# Altium PCB Inverter45attempt.PcbDoc (part 3 of 3)
Units mm, origin at the board's own origin, x right, y up, seen from the top; angles counter-clockwise.
Board outline 150 x 150 mm, 2 copper layers (Top Layer, Bottom Layer), stack 1.74 mm thick; 275 components, 191 nets, 1690 pads, 661 vias.
Unrouted connection lines stored in the file: 411.
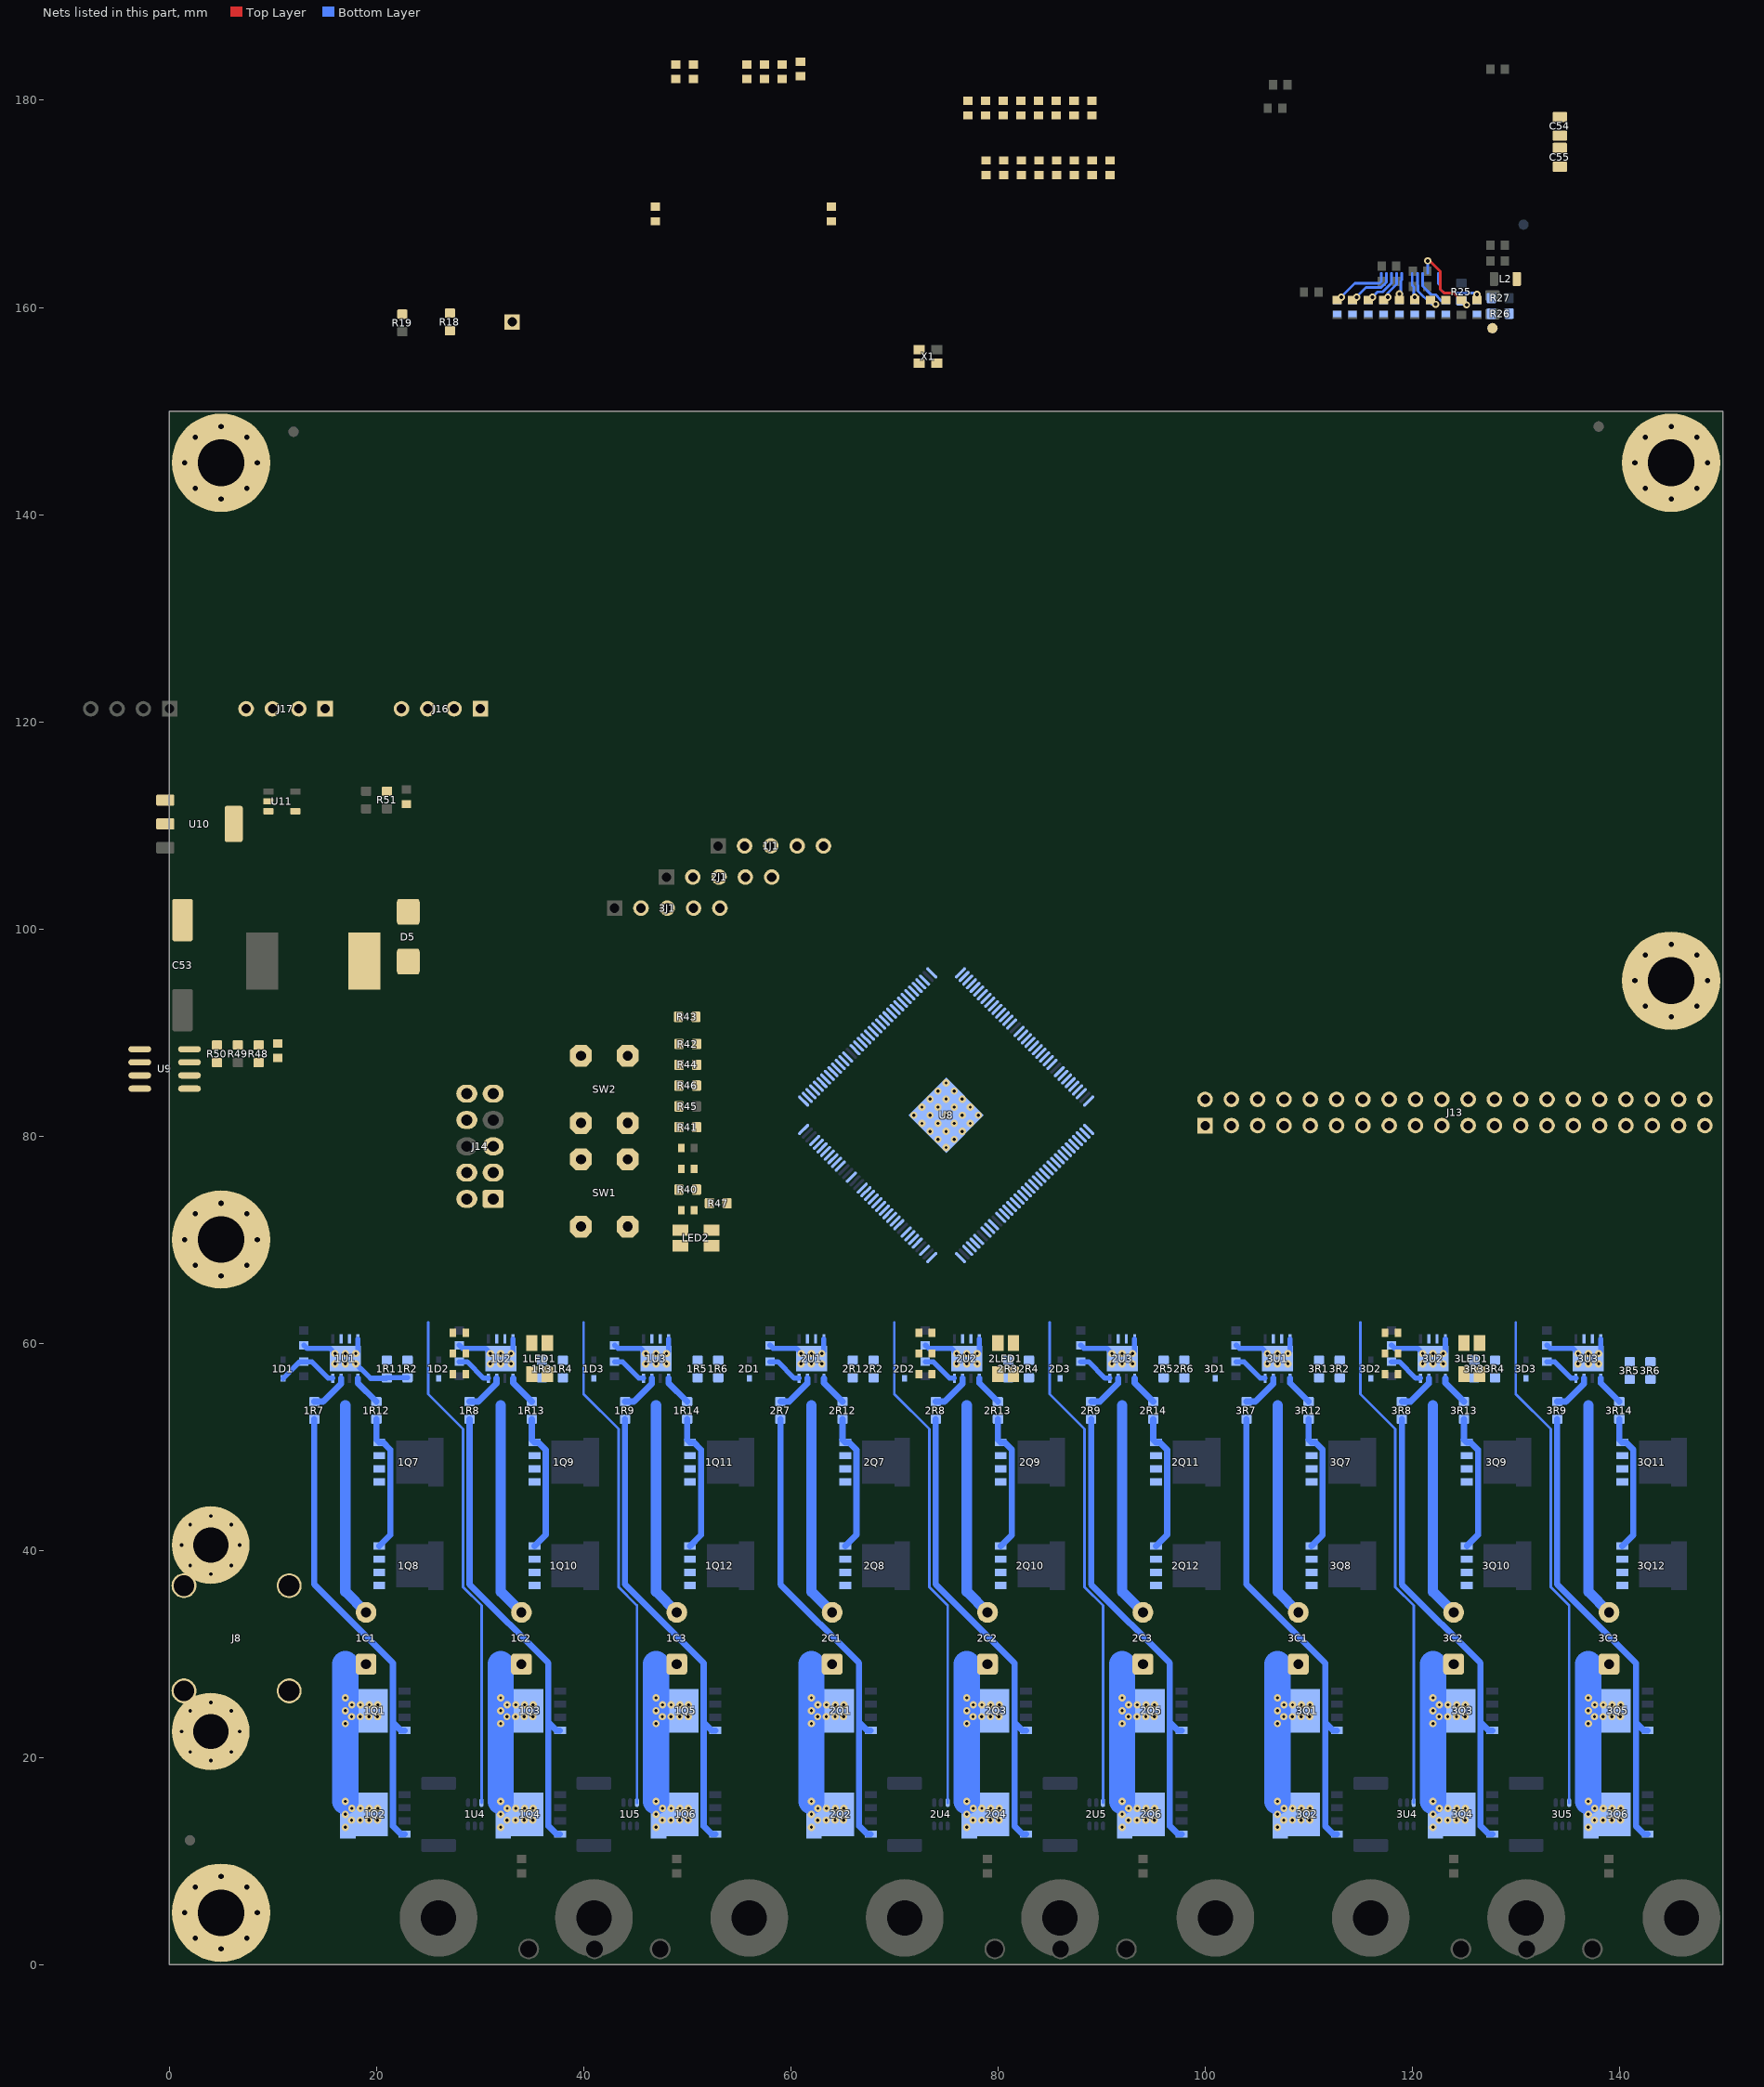
[diagram p3: the nets of this part, all layers, seen from the top]

## Via types
v1: diameter 0.7, hole 0.3, Top Layer to Bottom Layer, 475 vias
v2: diameter 0.7, hole 0.35, Top Layer to Bottom Layer, 119 vias
v3: diameter 1.27, hole 0.5, Top Layer to Bottom Layer, 40 vias
v4: diameter 1, hole 0.6, Top Layer to Bottom Layer, 27 vias

## Nets (pads, with @x,y where several pads share a name; then routed paths per layer and width w, separated by ;. In a path a pad name is that pad's centre, name@x,y a point inside that pad or via, vN(x,y) a via of type N, cw(c..) or ccw(c..) an arc to the next point about the centre after c; other vN are vias at no path point) (continued)
DCBUS: 1C1.1 1C2.1 1C3.1 1Q1.D 1Q2.D 1Q3.D 1Q4.D 1Q5.D 1Q6.D 2C1.1 2C2.1 2C3.1 2Q1.D 2Q2.D 2Q3.D 2Q4.D 2Q5.D 2Q6.D 3C1.1 3C2.1 3C3.1 3Q1.D 3Q2.D 3Q3.D 3Q4.D 3Q5.D 3Q6.D J6.1 J8.1 R26.2 R48.2 U9.6 U11.4 | length 792
  Bottom Layer w2.54: v1(17,15.75) v1(17,23.25) ; v1(32,15.75) v1(32,23.25) ; v1(47,15.75) v1(47,23.25) ; v1(62,15.75) v1(62,23.25) ; v1(77,15.75) v1(77,23.25) ; v1(92,15.75) v1(92,23.25) ; v1(107,15.75) v1(107,23.25) ; v1(122,15.75) v1(122,23.25) ; v1(137,15.75) v1(137,23.25) ; v1(17,23.25) v1(17,24.5) ; v1(17,23.25) v1(17,24.5) ; v1(17,23.25) v1(17,24.5) ; v1(17,23.25) v1(17,24.5) ; v1(17,23.25) v1(17,24.5) ; v1(17,23.25) v1(17,24.5) ; v1(17,23.25) v1(17,24.5) ; v1(17,23.25) v1(17,24.5) ; v1(17,23.25) v1(17,24.5) ; v1(17,23.25) v1(17,24.5) ; v1(17,23.25) v1(17,24.5) ; v1(17,23.25) v1(17,24.5) ; v1(17,23.25) v1(17,24.5) ; v1(17,23.25) v1(17,24.5) ; v1(17,24.5) v1(17,25.75) ; v1(17,24.5) v1(17,25.75) ; v1(17,24.5) v1(17,25.75) ; v1(17,24.5) v1(17,25.75) ; v1(17,24.5) v1(17,25.75) ; v1(17,24.5) v1(17,25.75) ; v1(17,24.5) v1(17,25.75) ; v1(17,24.5) v1(17,25.75) ; v1(17,24.5) v1(17,25.75) ; v1(17,24.5) v1(17,25.75) ; v1(17,24.5) v1(17,25.75) ; v1(17,24.5) v1(17,25.75) ; v1(17,24.5) v1(17,25.75) ; v1(17,24.5) v1(17,25.75) ; v1(17,25.75) 17,29 ; v1(17,25.75) 17,29 ; v1(17,25.75) 17,29 ; v1(17,25.75) 17,29 ; v1(17,25.75) 17,29 ; v1(17,25.75) 17,29 ; v1(17,25.75) 17,29 ; v1(17,25.75) 17,29 ; v1(17,25.75) 17,29 ; v1(17,25.75) 17,29 ; v1(17,25.75) 17,29 ; v1(17,25.75) 17,29 ; v1(17,25.75) 17,29 ; v1(17,25.75) 17,29 ; v1(32,23.25) v1(32,24.5) ; v1(32,23.25) v1(32,24.5) ; v1(32,23.25) v1(32,24.5) ; v1(32,23.25) v1(32,24.5) ; v1(32,23.25) v1(32,24.5) ; v1(32,23.25) v1(32,24.5) ; v1(32,23.25) v1(32,24.5) ; v1(32,23.25) v1(32,24.5) ; v1(32,23.25) v1(32,24.5) ; v1(32,23.25) v1(32,24.5) ; v1(32,23.25) v1(32,24.5) ; v1(32,23.25) v1(32,24.5) ; v1(32,23.25) v1(32,24.5) ; v1(32,23.25) v1(32,24.5) ; v1(32,24.5) v1(32,25.75) ; v1(32,24.5) v1(32,25.75) ; v1(32,24.5) v1(32,25.75) ; v1(32,24.5) v1(32,25.75) ; v1(32,24.5) v1(32,25.75) ; v1(32,24.5) v1(32,25.75) ; v1(32,24.5) v1(32,25.75) ; v1(32,24.5) v1(32,25.75) ; v1(32,24.5) v1(32,25.75) ; v1(32,24.5) v1(32,25.75) ; v1(32,24.5) v1(32,25.75) ; v1(32,24.5) v1(32,25.75) ; v1(32,24.5) v1(32,25.75) ; v1(32,24.5) v1(32,25.75) ; v1(32,25.75) 32,29 ; v1(32,25.75) 32,29 ; v1(32,25.75) 32,29 ; v1(32,25.75) 32,29 ; v1(32,25.75) 32,29 ; v1(32,25.75) 32,29 ; v1(32,25.75) 32,29 ; v1(32,25.75) 32,29 ; v1(32,25.75) 32,29 ; v1(32,25.75) 32,29 ; v1(32,25.75) 32,29 ; v1(32,25.75) 32,29 ; v1(32,25.75) 32,29 ; v1(32,25.75) 32,29 ; v1(47,23.25) v1(47,24.5) ; v1(47,23.25) v1(47,24.5) ; v1(47,23.25) v1(47,24.5) ; v1(47,23.25) v1(47,24.5) ; v1(47,23.25) v1(47,24.5) ; v1(47,23.25) v1(47,24.5) ; v1(47,23.25) v1(47,24.5) ; v1(47,23.25) v1(47,24.5) ; v1(47,23.25) v1(47,24.5) ; v1(47,23.25) v1(47,24.5) ; v1(47,23.25) v1(47,24.5) ; v1(47,23.25) v1(47,24.5) ; v1(47,23.25) v1(47,24.5) ; v1(47,23.25) v1(47,24.5) ; v1(47,24.5) v1(47,25.75) ; v1(47,24.5) v1(47,25.75) ; v1(47,24.5) v1(47,25.75) ; v1(47,24.5) v1(47,25.75) ; v1(47,24.5) v1(47,25.75) ; v1(47,24.5) v1(47,25.75) ; v1(47,24.5) v1(47,25.75) ; v1(47,24.5) v1(47,25.75) ; v1(47,24.5) v1(47,25.75) ; v1(47,24.5) v1(47,25.75) ; v1(47,24.5) v1(47,25.75) ; v1(47,24.5) v1(47,25.75) ; v1(47,24.5) v1(47,25.75) ; v1(47,24.5) v1(47,25.75) ; v1(47,25.75) 47,29 ; v1(47,25.75) 47,29 ; v1(47,25.75) 47,29 ; v1(47,25.75) 47,29 ; v1(47,25.75) 47,29 ; v1(47,25.75) 47,29 ; v1(47,25.75) 47,29 ; v1(47,25.75) 47,29 ; v1(47,25.75) 47,29 ; v1(47,25.75) 47,29 ; v1(47,25.75) 47,29 ; v1(47,25.75) 47,29 ; v1(47,25.75) 47,29 ; v1(47,25.75) 47,29 ; v1(62,23.25) v1(62,24.5) ; v1(62,23.25) v1(62,24.5) ; v1(62,23.25) v1(62,24.5) ; v1(62,23.25) v1(62,24.5) ; v1(62,23.25) v1(62,24.5) ; v1(62,23.25) v1(62,24.5) ; v1(62,23.25) v1(62,24.5) ; v1(62,23.25) v1(62,24.5) ; v1(62,23.25) v1(62,24.5) ; v1(62,23.25) v1(62,24.5) ; v1(62,23.25) v1(62,24.5) ; v1(62,23.25) v1(62,24.5) ; v1(62,23.25) v1(62,24.5) ; v1(62,23.25) v1(62,24.5) ; v1(62,24.5) v1(62,25.75) ; v1(62,24.5) v1(62,25.75) ; v1(62,24.5) v1(62,25.75) ; v1(62,24.5) v1(62,25.75) ; v1(62,24.5) v1(62,25.75) ; v1(62,24.5) v1(62,25.75) ; v1(62,24.5) v1(62,25.75) ; v1(62,24.5) v1(62,25.75) ; v1(62,24.5) v1(62,25.75) ; v1(62,24.5) v1(62,25.75) ; v1(62,24.5) v1(62,25.75) ; v1(62,24.5) v1(62,25.75) ; v1(62,24.5) v1(62,25.75) ; v1(62,24.5) v1(62,25.75) ; v1(62,25.75) 62,29 ; v1(62,25.75) 62,29 ; v1(62,25.75) 62,29 ; v1(62,25.75) 62,29 ; v1(62,25.75) 62,29 ; v1(62,25.75) 62,29 ; v1(62,25.75) 62,29 ; v1(62,25.75) 62,29 ; v1(62,25.75) 62,29 ; v1(62,25.75) 62,29 ; v1(62,25.75) 62,29 ; v1(62,25.75) 62,29 ; v1(62,25.75) 62,29 ; v1(62,25.75) 62,29 ; v1(77,23.25) v1(77,24.5) ; v1(77,23.25) v1(77,24.5) ; v1(77,23.25) v1(77,24.5) ; v1(77,23.25) v1(77,24.5) ; v1(77,23.25) v1(77,24.5) ; v1(77,23.25) v1(77,24.5) ; v1(77,23.25) v1(77,24.5) ; v1(77,23.25) v1(77,24.5) ; v1(77,23.25) v1(77,24.5) ; v1(77,23.25) v1(77,24.5) ; v1(77,23.25) v1(77,24.5) ; v1(77,23.25) v1(77,24.5) ; v1(77,23.25) v1(77,24.5) ; v1(77,23.25) v1(77,24.5) ; v1(77,24.5) v1(77,25.75) ; v1(77,24.5) v1(77,25.75) ; v1(77,24.5) v1(77,25.75) ; v1(77,24.5) v1(77,25.75) ; v1(77,24.5) v1(77,25.75) ; v1(77,24.5) v1(77,25.75) ; v1(77,24.5) v1(77,25.75) ; v1(77,24.5) v1(77,25.75) ; v1(77,24.5) v1(77,25.75) ; v1(77,24.5) v1(77,25.75) ; v1(77,24.5) v1(77,25.75) ; v1(77,24.5) v1(77,25.75) ; v1(77,24.5) v1(77,25.75) ; v1(77,24.5) v1(77,25.75) ; v1(77,25.75) 77,29 ; v1(77,25.75) 77,29 ; v1(77,25.75) 77,29 ; v1(77,25.75) 77,29 ; v1(77,25.75) 77,29 ; v1(77,25.75) 77,29 ; v1(77,25.75) 77,29 ; v1(77,25.75) 77,29 ; v1(77,25.75) 77,29 ; v1(77,25.75) 77,29 ; v1(77,25.75) 77,29 ; v1(77,25.75) 77,29 ; v1(77,25.75) 77,29 ; v1(77,25.75) 77,29 ; v1(92,23.25) v1(92,24.5) ; v1(92,23.25) v1(92,24.5) ; v1(92,23.25) v1(92,24.5) ; v1(92,23.25) v1(92,24.5) ; v1(92,23.25) v1(92,24.5) ; v1(92,23.25) v1(92,24.5) ; v1(92,23.25) v1(92,24.5) ; v1(92,23.25) v1(92,24.5) ; v1(92,23.25) v1(92,24.5) ; v1(92,23.25) v1(92,24.5) ; v1(92,23.25) v1(92,24.5) ; v1(92,23.25) v1(92,24.5) ; v1(92,23.25) v1(92,24.5) ; v1(92,23.25) v1(92,24.5) ; v1(92,24.5) v1(92,25.75) ; v1(92,24.5) v1(92,25.75) ; v1(92,24.5) v1(92,25.75) ; v1(92,24.5) v1(92,25.75) ; v1(92,24.5) v1(92,25.75) ; v1(92,24.5) v1(92,25.75) ; v1(92,24.5) v1(92,25.75) ; v1(92,24.5) v1(92,25.75) ; v1(92,24.5) v1(92,25.75) ; v1(92,24.5) v1(92,25.75) ; v1(92,24.5) v1(92,25.75) ; v1(92,24.5) v1(92,25.75) ; v1(92,24.5) v1(92,25.75) ; v1(92,24.5) v1(92,25.75) ; v1(92,25.75) 92,29 ; v1(92,25.75) 92,29 ; v1(92,25.75) 92,29 ; v1(92,25.75) 92,29 ; v1(92,25.75) 92,29 ; v1(92,25.75) 92,29 ; v1(92,25.75) 92,29 ; v1(92,25.75) 92,29 ; v1(92,25.75) 92,29 ; v1(92,25.75) 92,29 ; v1(92,25.75) 92,29 ; v1(92,25.75) 92,29 ; v1(92,25.75) 92,29 ; v1(92,25.75) 92,29 ; v1(107,23.25) v1(107,24.5) ; v1(107,23.25) v1(107,24.5) ; v1(107,23.25) v1(107,24.5) ; v1(107,23.25) v1(107,24.5) ; v1(107,23.25) v1(107,24.5) ; v1(107,23.25) v1(107,24.5) ; v1(107,23.25) v1(107,24.5) ; v1(107,23.25) v1(107,24.5) ; v1(107,23.25) v1(107,24.5) ; v1(107,23.25) v1(107,24.5) ; v1(107,23.25) v1(107,24.5) ; v1(107,23.25) v1(107,24.5) ; v1(107,23.25) v1(107,24.5) ; v1(107,23.25) v1(107,24.5) ; v1(107,24.5) v1(107,25.75) ; v1(107,24.5) v1(107,25.75) ; v1(107,24.5) v1(107,25.75) ; v1(107,24.5) v1(107,25.75) ; v1(107,24.5) v1(107,25.75) ; v1(107,24.5) v1(107,25.75) ; v1(107,24.5) v1(107,25.75) ; v1(107,24.5) v1(107,25.75) ; v1(107,24.5) v1(107,25.75) ; v1(107,24.5) v1(107,25.75) ; v1(107,24.5) v1(107,25.75) ; v1(107,24.5) v1(107,25.75) ; v1(107,24.5) v1(107,25.75) ; v1(107,24.5) v1(107,25.75) ; v1(107,25.75) 107,29 ; v1(107,25.75) 107,29 ; v1(107,25.75) 107,29 ; v1(107,25.75) 107,29 ; v1(107,25.75) 107,29 ; v1(107,25.75) 107,29 ; v1(107,25.75) 107,29 ; v1(107,25.75) 107,29 ; v1(107,25.75) 107,29 ; v1(107,25.75) 107,29 ; v1(107,25.75) 107,29 ; v1(107,25.75) 107,29 ; v1(107,25.75) 107,29 ; v1(107,25.75) 107,29 ; v1(122,23.25) v1(122,24.5) ; v1(122,23.25) v1(122,24.5) ; v1(122,23.25) v1(122,24.5) ; v1(122,23.25) v1(122,24.5) ; v1(122,23.25) v1(122,24.5) ; v1(122,23.25) v1(122,24.5) ; v1(122,23.25) v1(122,24.5) ; v1(122,23.25) v1(122,24.5) ; v1(122,23.25) v1(122,24.5) ; v1(122,23.25) v1(122,24.5) ; v1(122,23.25) v1(122,24.5) ; v1(122,23.25) v1(122,24.5) ; v1(122,23.25) v1(122,24.5) ; v1(122,23.25) v1(122,24.5) ; v1(122,24.5) v1(122,25.75) ; v1(122,24.5) v1(122,25.75) ; v1(122,24.5) v1(122,25.75) ; v1(122,24.5) v1(122,25.75) ; v1(122,24.5) v1(122,25.75) ; v1(122,24.5) v1(122,25.75) ; v1(122,24.5) v1(122,25.75) ; v1(122,24.5) v1(122,25.75) ; v1(122,24.5) v1(122,25.75) ; v1(122,24.5) v1(122,25.75) ; v1(122,24.5) v1(122,25.75) ; v1(122,24.5) v1(122,25.75) ; v1(122,24.5) v1(122,25.75) ; v1(122,24.5) v1(122,25.75) ; v1(122,25.75) 122,29 ; v1(122,25.75) 122,29 ; v1(122,25.75) 122,29 ; v1(122,25.75) 122,29 ; v1(122,25.75) 122,29 ; v1(122,25.75) 122,29 ; v1(122,25.75) 122,29 ; v1(122,25.75) 122,29 ; v1(122,25.75) 122,29 ; v1(122,25.75) 122,29 ; v1(122,25.75) 122,29 ; v1(122,25.75) 122,29 ; v1(122,25.75) 122,29 ; v1(122,25.75) 122,29 ; v1(137,23.25) v1(137,24.5) ; v1(137,23.25) v1(137,24.5) ; v1(137,23.25) v1(137,24.5) ; v1(137,23.25) v1(137,24.5) ; v1(137,23.25) v1(137,24.5) ; v1(137,23.25) v1(137,24.5) ; v1(137,23.25) v1(137,24.5) ; v1(137,23.25) v1(137,24.5) ; v1(137,23.25) v1(137,24.5) ; v1(137,23.25) v1(137,24.5) ; v1(137,23.25) v1(137,24.5) ; v1(137,23.25) v1(137,24.5) ; v1(137,23.25) v1(137,24.5) ; v1(137,23.25) v1(137,24.5) ; v1(137,24.5) v1(137,25.75) ; v1(137,24.5) v1(137,25.75) ; v1(137,24.5) v1(137,25.75) ; v1(137,24.5) v1(137,25.75) ; v1(137,24.5) v1(137,25.75) ; v1(137,24.5) v1(137,25.75) ; v1(137,24.5) v1(137,25.75) ; v1(137,24.5) v1(137,25.75) ; v1(137,24.5) v1(137,25.75) ; v1(137,24.5) v1(137,25.75) ; v1(137,24.5) v1(137,25.75) ; v1(137,24.5) v1(137,25.75) ; v1(137,24.5) v1(137,25.75) ; v1(137,24.5) v1(137,25.75) ; v1(137,25.75) 137,29 ; v1(137,25.75) 137,29 ; v1(137,25.75) 137,29 ; v1(137,25.75) 137,29 ; v1(137,25.75) 137,29 ; v1(137,25.75) 137,29 ; v1(137,25.75) 137,29 ; v1(137,25.75) 137,29 ; v1(137,25.75) 137,29 ; v1(137,25.75) 137,29 ; v1(137,25.75) 137,29 ; v1(137,25.75) 137,29 ; v1(137,25.75) 137,29 ; v1(137,25.75) 137,29
  other v1: 17,13.25 32,13.25 47,13.25 62,13.25 77,13.25 92,13.25 107,13.25 122,13.25 137,13.25 17.6,13.925 18.425,13.925 19.275,13.925 20.1,13.925 32.6,13.925 33.425,13.925 34.275,13.925 35.1,13.925 47.6,13.925 48.425,13.925 49.275,13.925 50.1,13.925 62.6,13.925 63.425,13.925 64.275,13.925 65.1,13.925 77.6,13.925 78.425,13.925 79.275,13.925 80.1,13.925 92.6,13.925 93.425,13.925 94.275,13.925 95.1,13.925 107.6,13.925 108.425,13.925 109.275,13.925 110.1,13.925 122.6,13.925 123.425,13.925 124.275,13.925 125.1,13.925 137.6,13.925 138.425,13.925 139.275,13.925 140.1,13.925 17,14.5 32,14.5 47,14.5 62,14.5 77,14.5 92,14.5 107,14.5 122,14.5 137,14.5 17.625,15.075 18.45,15.075 19.3,15.075 20.125,15.075 32.625,15.075 33.45,15.075 34.3,15.075 35.125,15.075 47.625,15.075 48.45,15.075 49.3,15.075 50.125,15.075 62.625,15.075 63.45,15.075 64.3,15.075 65.125,15.075 77.625,15.075 78.45,15.075 79.3,15.075 80.125,15.075 92.625,15.075 93.45,15.075 94.3,15.075 95.125,15.075 107.625,15.075 108.45,15.075 109.3,15.075 110.125,15.075 122.625,15.075 123.45,15.075 124.3,15.075 125.125,15.075 137.625,15.075 138.45,15.075 139.3,15.075 140.125,15.075 17.6,23.925 18.425,23.925 19.275,23.925 20.1,23.925 32.6,23.925 33.425,23.925 34.275,23.925 35.1,23.925 47.6,23.925 48.425,23.925 49.275,23.925 50.1,23.925 62.6,23.925 63.425,23.925 64.275,23.925 65.1,23.925 77.6,23.925 78.425,23.925 79.275,23.925 80.1,23.925 92.6,23.925 93.425,23.925 94.275,23.925 95.1,23.925 107.6,23.925 108.425,23.925 109.275,23.925 110.1,23.925 122.6,23.925 123.425,23.925 124.275,23.925 125.1,23.925 137.6,23.925 138.425,23.925 139.275,23.925 140.1,23.925 17.625,25.075 18.45,25.075 19.3,25.075 20.125,25.075 32.625,25.075 33.45,25.075 34.3,25.075 35.125,25.075 47.625,25.075 48.45,25.075 49.3,25.075 50.125,25.075 62.625,25.075 63.45,25.075 64.3,25.075 65.125,25.075 77.625,25.075 78.45,25.075 79.3,25.075 80.125,25.075 92.625,25.075 93.45,25.075 94.3,25.075 95.125,25.075 107.625,25.075 108.45,25.075 109.3,25.075 110.125,25.075 122.625,25.075 123.45,25.075 124.3,25.075 125.125,25.075 137.625,25.075 138.45,25.075 139.3,25.075 140.125,25.075
  other v2: 4,19.7 2.02,20.52 5.98,20.52 1.2,22.5 6.8,22.5 2.02,24.48 5.98,24.48 4,25.3
ENC_A1: 1J1.2 U8.60
ENC_A2: 2J1.2 U8.57
ENC_A3: 3J1.2 U8.48
ENC_B1: 1J1.3 U8.61
ENC_B2: 2J1.3 U8.58
ENC_B3: 3J1.3 U8.55
ENC_Z1: 1J1.4 U8.62
ENC_Z2: 2J1.4 U8.59
ENC_Z3: 3J1.4 U8.56
GND: 1C1.2 1C2.2 1C3.2 1C7.1 1C8.1 1C9.1 1J1.5 1Q7.S 1Q8.S 1Q9.S 1Q10.S 1Q11.S 1Q12.S 1R1.1 1R2.1 1R3.1 1R4.1 1R5.1 1R6.1 1U1.4 1U1.9 1U2.4 1U2.9 1U3.4 1U3.9 2C1.2 2C2.2 2C3.2 2C7.1 2C8.1 2C9.1 2J1.5 2Q7.S 2Q8.S 2Q9.S 2Q10.S 2Q11.S 2Q12.S 2R1.1 2R2.1 2R3.1 2R4.1 2R5.1 2R6.1 2U1.4 2U1.9 2U2.4 2U2.9 2U3.4 2U3.9 3C1.2 3C2.2 3C3.2 3C7.1 3C8.1 3C9.1 3J1.5 3Q7.S 3Q8.S 3Q9.S 3Q10.S 3Q11.S 3Q12.S 3R1.1 3R2.1 3R3.1 3R4.1 3R5.1 3R6.1 3U1.4 3U1.9 3U2.4 3U2.9 3U3.4 3U3.9 C28.1 C29.1 C30.1 C31.1 C32.1 C33.1 C34.1 C35.1 C36.1 C37.1 C38.1 C39.1 C40.1 C41.1 C42.1 C43.1 C44.1 C53.2 C54.1 C55.1 C56.1 C57.1 C58.1 C59.1 C60.1 C61.1 C62.1 C63.1 C65.1 D5.A J7.1 J8.2 J13.39 J13.40 J14.2 J14.10 J17.1 J17.2 J17.3 J17.4 MH1.1 MH2.1 MH3.1 MH4.1 MH5.1 R47.1 R50.1 SP1.1 SW1.1 SW2.1 U8.42 U8.53 U8.63 U8.68 U8.83 U8.95 U8.104 U8.116 U8.125 U8.133 U8.137 U8.142 U8.145 U9.4 U10.1 U11.2 X1.2 | length 234.6
  Bottom Layer w0.5: 1C7.1@13,59.8 13.3,59.5 15.5,59.5 v1(16,59) ; 1U1.9@18,58 18.495,57.505 18.536,57.505 19.441,56.6 20.95,56.6 1R1.1@21,56.65 1R2.1@23,56.65 ; v1(18,59) 18.2,59.2 1U1.4@18.2,60.395 ; 1C8.1@28,59.8 28.3,59.5 30.5,59.5 v1(31,59) ; 1U2.9@33.2,59.2 1U2.4@33.2,60.395 ; 1C9.1@43,59.8 43.3,59.5 45.5,59.5 v1(46,59) ; 1U3.9@48.2,59.2 1U3.4@48.2,60.395 ; 2C7.1@58,59.8 58.3,59.5 60.5,59.5 v1(61,59) ; v1(63,59) 63.2,59.2 2U1.4@63.2,60.395 ; 2C8.1@73,59.8 73.3,59.5 75.5,59.5 v1(76,59) ; 2U2.9@78.2,59.2 2U2.4@78.2,60.395 ; 2C9.1@88,59.8 88.3,59.5 90.5,59.5 v1(91,59) ; 2U3.9@93.2,59.2 2U3.4@93.2,60.395 ; 3C7.1@103,59.8 103.3,59.5 105.5,59.5 v1(106,59) ; v1(108,59) 108.2,59.2 3U1.4@108.2,60.395 ; 3C8.1@118,59.8 118.3,59.5 120.5,59.5 v1(121,59) ; 3U2.9@123.2,59.2 3U2.4@123.2,60.395 ; 3C9.1@133,59.8 133.3,59.5 135.5,59.5 v1(136,59) ; 3U3.9@138.2,59.2 3U3.4@138.2,60.395
  Bottom Layer w1: 17,54 17,36 1C1.2@19,34 ; 32,54 32,36 1C2.2@34,34 ; 47,54 47,36 1C3.2@49,34 ; 62,54 62,36 2C1.2@64,34 ; 77,54 77,36 2C2.2@79,34 ; 92,54 92,36 2C3.2@94,34 ; 107,54 107,36 3C1.2@109,34 ; 122,54 122,36 3C2.2@124,34 ; 137,54 137,36 3C3.2@139,34
  other v1: 16,58 17,58 18,58 31,58 32,58 33,58 46,58 47,58 48,58 61,58 62,58 63,58 76,58 77,58 78,58 91,58 92,58 93,58 106,58 107,58 108,58 121,58 122,58 123,58 136,58 137,58 138,58 17,59 32,59 33,59 47,59 48,59 62,59 77,59 78,59 92,59 93,59 107,59 122,59 123,59 137,59 138,59 75,78.889 74.222,79.667 75.778,79.667 73.444,80.444 75,80.444 76.556,80.444 72.667,81.222 74.222,81.222 75.778,81.222 77.333,81.222 71.889,82 73.444,82 75,82 76.556,82 78.111,82 72.667,82.778 74.222,82.778 75.778,82.778 77.333,82.778 73.444,83.556 75,83.556 76.556,83.556 74.222,84.333 75.778,84.333 75,85.111
  other v2: 4,37.7 2.02,38.52 5.98,38.52 1.2,40.5 6.8,40.5 2.02,42.48 5.98,42.48 4,43.3
  other v3: 5,1.5 2.525,2.525 7.475,2.525 1.5,5 8.5,5 2.525,7.475 7.475,7.475 5,8.5 5,66.5 2.525,67.525 7.475,67.525 1.5,70 8.5,70 2.525,72.475 7.475,72.475 5,73.5 145,91.5 142.525,92.525 147.475,92.525 141.5,95 148.5,95 142.525,97.475 147.475,97.475 145,98.5 5,141.5 145,141.5 2.525,142.525 7.475,142.525 142.525,142.525 147.475,142.525 1.5,145 8.5,145 141.5,145 148.5,145 2.525,147.475 7.475,147.475 142.525,147.475 147.475,147.475 5,148.5 145,148.5
GPIO1: J13.1 U8.66
GPIO2: J13.2 U8.70
GPIO3: J13.3 U8.64
GPIO4: J13.4 U8.69
GPIO5: J13.5 U8.75
GPIO6: J13.6 U8.65
GPIO7: J13.7 U8.77
GPIO8: J13.8 U8.74
GPIO9: J13.9 U8.79
GPIO10: J13.10 U8.76
GPIO11: J13.11 U8.81
GPIO12: J13.12 U8.78
GPIO13: J13.13 U8.85
GPIO14: J13.14 U8.80
GPIO15: J13.15 U8.87
GPIO16: J13.16 U8.84
GPIO17: J13.17 U8.90
GPIO18: J13.18 U8.86
GPIO19: J13.19 U8.92
GPIO20: J13.20 U8.89
GPIO21: J13.21 U8.96
GPIO22: J13.22 U8.91
GPIO23: J13.23 U8.98
GPIO24: J13.24 U8.93
GPIO25: J13.25 U8.101
GPIO26: J13.26 U8.97
GPIO27: J13.27 U8.102
GPIO28: J13.28 U8.100
GPIO29: J13.29 U8.105
IA1: 1U4.6 R34.1 | length 48.5
  Bottom Layer w0.254: 25,62 25,55.073 28.373,51.7 28.373,36.44 30.15,34.663 1U4.6@30.15,15.625
IA2: 2U4.6 R32.1 | length 48.5
  Bottom Layer w0.254: 70,62 70,55.073 73.373,51.7 73.373,36.44 75.15,34.663 2U4.6@75.15,15.625
IA3: 3U4.6 R30.1 | length 48.5
  Bottom Layer w0.254: 115,62 115,55.073 118.373,51.7 118.373,36.44 120.15,34.663 3U4.6@120.15,15.625
IB1: 1U5.6 R33.1 | length 48.5
  Bottom Layer w0.254: 40,62 40,55.073 43.373,51.7 43.373,36.44 45.15,34.663 1U5.6@45.15,15.625
IB2: 2U5.6 R31.1 | length 48.5
  Bottom Layer w0.254: 85,62 85,55.073 88.373,51.7 88.373,36.44 90.15,34.663 2U5.6@90.15,15.625
IB3: 3U5.6 R29.1 | length 48.5
  Bottom Layer w0.254: 130,62 130,55.073 133.373,51.7 133.373,36.44 135.15,34.663 3U5.6@135.15,15.625
JTAGEN: J14.8 R42.1 U8.15
LEDB1: 1R17.2 U8.29
LEDB2: 2R17.2 U8.26
LEDB3: 3R17.2 U8.135
LEDG1: 1R16.2 U8.30
LEDG2: 2R16.2 U8.141
LEDG3: 3R16.2 U8.132
LEDR1: 1R15.2 U8.28
LEDR2: 2R15.2 U8.27
LEDR3: 3R15.2 U8.140
NCONFIG: R44.1 SW2.2 U8.129
Net1C4_2: 1C4.2 1D1.K 1U1.8 | length 6.1
  Bottom Layer w0.5: 1D1.K@11,56.6 12.6,58.2 1C4.2@13,58.2 13.75,58.2 15.345,56.605 1U1.8@15.8,56.605
Net1C5_2: 1C5.2 1D2.K 1U2.8 | length 3.5
  Bottom Layer w0.5: 1C5.2@28,58.2 28.75,58.2 30.345,56.605 1U2.8@30.8,56.605
Net1C6_2: 1C6.2 1D3.K 1U3.8 | length 3.5
  Bottom Layer w0.5: 1C6.2@43,58.2 43.75,58.2 45.345,56.605 1U3.8@45.8,56.605
Net1LED1_1: 1LED1.1 1R15.1
Net1LED1_2: 1LED1.2 1R16.1
Net1LED1_3: 1LED1.3 1R17.1
Net1Q1_G: 1Q1.G 1Q2.G 1R7.1 | length 45.3
  Bottom Layer w0.6: 1R7.1@14,52.65 14,36.7 21.6,29.1 21.6,23.358 ; 1Q2.G@22.725,12.595 22.363,12.595 21.6,13.358 21.6,23.358 ; 1Q1.G@22.725,22.595 22.363,22.595 21.6,23.358
Net1Q3_G: 1Q3.G 1Q4.G 1R8.1 | length 45.3
  Bottom Layer w0.6: 1R8.1@29,52.65 29,36.7 36.6,29.1 36.6,23.358 ; 1Q4.G@37.725,12.595 37.363,12.595 36.6,13.358 36.6,23.358 ; 1Q3.G@37.725,22.595 37.363,22.595 36.6,23.358
Net1Q5_G: 1Q5.G 1Q6.G 1R9.1 | length 45.3
  Bottom Layer w0.6: 1R9.1@44,52.65 44,36.7 51.6,29.1 51.6,23.358 ; 1Q6.G@52.725,12.595 52.363,12.595 51.6,13.358 51.6,23.358 ; 1Q5.G@52.725,22.595 52.363,22.595 51.6,23.358
Net1Q7_G: 1Q7.G 1Q8.G 1R12.1 | length 13.5
  Bottom Layer w0.6: 1R12.1@20,52.65 20,50.68 1Q7.G@20.275,50.405 20.637,50.405 21.35,49.692 21.35,41.48 1Q8.G@20.275,40.405
Net1Q9_G: 1Q9.G 1Q10.G 1R13.1 | length 13.5
  Bottom Layer w0.6: 1R13.1@35,52.65 35,50.68 1Q9.G@35.275,50.405 35.637,50.405 36.35,49.692 36.35,41.48 1Q10.G@35.275,40.405
Net1Q11_G: 1Q11.G 1Q12.G 1R14.1 | length 13.5
  Bottom Layer w0.6: 1R14.1@50,52.65 50,50.68 1Q11.G@50.275,50.405 50.637,50.405 51.35,49.692 51.35,41.48 1Q12.G@50.275,40.405
Net1R7_2: 1R7.2 1U1.7 | length 3.8
  Bottom Layer w0.6: 1R7.2@14,54.35 14.852,54.35 16.6,56.098 1U1.7@16.6,56.605
Net1R8_2: 1R8.2 1U2.7 | length 3.8
  Bottom Layer w0.6: 1R8.2@29,54.35 29.852,54.35 31.6,56.098 1U2.7@31.6,56.605
Net1R9_2: 1R9.2 1U3.7 | length 3.8
  Bottom Layer w0.6: 1R9.2@44,54.35 44.852,54.35 46.6,56.098 1U3.7@46.6,56.605
Net1R12_2: 1R12.2 1U1.5 | length 3
  Bottom Layer w0.6: 1U1.5@18.2,56.605 18.2,56.15 1R12.2@20,54.35
Net1R13_2: 1R13.2 1U2.5 | length 3
  Bottom Layer w0.6: 1U2.5@33.2,56.605 33.2,56.15 1R13.2@35,54.35
Net1R14_2: 1R14.2 1U3.5 | length 3
  Bottom Layer w0.6: 1U3.5@48.2,56.605 48.2,56.15 1R14.2@50,54.35
Net2C4_2: 2C4.2 2D1.K 2U1.8 | length 3.5
  Bottom Layer w0.5: 2C4.2@58,58.2 58.75,58.2 60.345,56.605 2U1.8@60.8,56.605
Net2C5_2: 2C5.2 2D2.K 2U2.8 | length 3.5
  Bottom Layer w0.5: 2C5.2@73,58.2 73.75,58.2 75.345,56.605 2U2.8@75.8,56.605
Net2C6_2: 2C6.2 2D3.K 2U3.8 | length 3.5
  Bottom Layer w0.5: 2C6.2@88,58.2 88.75,58.2 90.345,56.605 2U3.8@90.8,56.605
Net2LED1_1: 2LED1.1 2R15.1
Net2LED1_2: 2LED1.2 2R16.1
Net2LED1_3: 2LED1.3 2R17.1
Net2Q1_G: 2Q1.G 2Q2.G 2R7.1 | length 45.3
  Bottom Layer w0.6: 2R7.1@59,52.65 59,36.7 66.6,29.1 66.6,23.358 ; 2Q2.G@67.725,12.595 67.363,12.595 66.6,13.358 66.6,23.358 ; 2Q1.G@67.725,22.595 67.363,22.595 66.6,23.358
Net2Q3_G: 2Q3.G 2Q4.G 2R8.1 | length 45.3
  Bottom Layer w0.6: 2R8.1@74,52.65 74,36.7 81.6,29.1 81.6,23.358 ; 2Q4.G@82.725,12.595 82.363,12.595 81.6,13.358 81.6,23.358 ; 2Q3.G@82.725,22.595 82.363,22.595 81.6,23.358
Net2Q5_G: 2Q5.G 2Q6.G 2R9.1 | length 45.3
  Bottom Layer w0.6: 2R9.1@89,52.65 89,36.7 96.6,29.1 96.6,23.358 ; 2Q6.G@97.725,12.595 97.363,12.595 96.6,13.358 96.6,23.358 ; 2Q5.G@97.725,22.595 97.363,22.595 96.6,23.358
Net2Q7_G: 2Q7.G 2Q8.G 2R12.1 | length 13.5
  Bottom Layer w0.6: 2R12.1@65,52.65 65,50.68 2Q7.G@65.275,50.405 65.637,50.405 66.35,49.692 66.35,41.48 2Q8.G@65.275,40.405
Net2Q9_G: 2Q9.G 2Q10.G 2R13.1 | length 13.5
  Bottom Layer w0.6: 2R13.1@80,52.65 80,50.68 2Q9.G@80.275,50.405 80.637,50.405 81.35,49.692 81.35,41.48 2Q10.G@80.275,40.405
Net2Q11_G: 2Q11.G 2Q12.G 2R14.1 | length 13.5
  Bottom Layer w0.6: 2R14.1@95,52.65 95,50.68 2Q11.G@95.275,50.405 95.637,50.405 96.35,49.692 96.35,41.48 2Q12.G@95.275,40.405
Net2R7_2: 2R7.2 2U1.7 | length 3.8
  Bottom Layer w0.6: 2R7.2@59,54.35 59.852,54.35 61.6,56.098 2U1.7@61.6,56.605
Net2R8_2: 2R8.2 2U2.7 | length 3.8
  Bottom Layer w0.6: 2R8.2@74,54.35 74.852,54.35 76.6,56.098 2U2.7@76.6,56.605
Net2R9_2: 2R9.2 2U3.7 | length 3.8
  Bottom Layer w0.6: 2R9.2@89,54.35 89.852,54.35 91.6,56.098 2U3.7@91.6,56.605
Net2R12_2: 2R12.2 2U1.5 | length 3
  Bottom Layer w0.6: 2U1.5@63.2,56.605 63.2,56.15 2R12.2@65,54.35
Net2R13_2: 2R13.2 2U2.5 | length 3
  Bottom Layer w0.6: 2U2.5@78.2,56.605 78.2,56.15 2R13.2@80,54.35
Net2R14_2: 2R14.2 2U3.5 | length 3
  Bottom Layer w0.6: 2U3.5@93.2,56.605 93.2,56.15 2R14.2@95,54.35
Net3C4_2: 3C4.2 3D1.K 3U1.8 | length 3.5
  Bottom Layer w0.5: 3C4.2@103,58.2 103.75,58.2 105.345,56.605 3U1.8@105.8,56.605
Net3C5_2: 3C5.2 3D2.K 3U2.8 | length 3.5
  Bottom Layer w0.5: 3C5.2@118,58.2 118.75,58.2 120.345,56.605 3U2.8@120.8,56.605
Net3C6_2: 3C6.2 3D3.K 3U3.8 | length 3.5
  Bottom Layer w0.5: 3C6.2@133,58.2 133.75,58.2 135.345,56.605 3U3.8@135.8,56.605
Net3LED1_1: 3LED1.1 3R15.1
Net3LED1_2: 3LED1.2 3R16.1
Net3LED1_3: 3LED1.3 3R17.1
Net3Q1_G: 3Q1.G 3Q2.G 3R7.1 | length 45.3
  Bottom Layer w0.6: 3R7.1@104,52.65 104,36.7 111.6,29.1 111.6,23.358 ; 3Q2.G@112.725,12.595 112.363,12.595 111.6,13.358 111.6,23.358 ; 3Q1.G@112.725,22.595 112.363,22.595 111.6,23.358
Net3Q3_G: 3Q3.G 3Q4.G 3R8.1 | length 45.3
  Bottom Layer w0.6: 3R8.1@119,52.65 119,36.7 126.6,29.1 126.6,23.358 ; 3Q4.G@127.725,12.595 127.363,12.595 126.6,13.358 126.6,23.358 ; 3Q3.G@127.725,22.595 127.363,22.595 126.6,23.358
Net3Q5_G: 3Q5.G 3Q6.G 3R9.1 | length 45.3
  Bottom Layer w0.6: 3R9.1@134,52.65 134,36.7 141.6,29.1 141.6,23.358 ; 3Q6.G@142.725,12.595 142.363,12.595 141.6,13.358 141.6,23.358 ; 3Q5.G@142.725,22.595 142.363,22.595 141.6,23.358
Net3Q7_G: 3Q7.G 3Q8.G 3R12.1 | length 13.5
  Bottom Layer w0.6: 3R12.1@110,52.65 110,50.68 3Q7.G@110.275,50.405 110.637,50.405 111.35,49.692 111.35,41.48 3Q8.G@110.275,40.405
Net3Q9_G: 3Q9.G 3Q10.G 3R13.1 | length 13.5
  Bottom Layer w0.6: 3R13.1@125,52.65 125,50.68 3Q9.G@125.275,50.405 125.637,50.405 126.35,49.692 126.35,41.48 3Q10.G@125.275,40.405
Net3Q11_G: 3Q11.G 3Q12.G 3R14.1 | length 13.5
  Bottom Layer w0.6: 3R14.1@140,52.65 140,50.68 3Q11.G@140.275,50.405 140.637,50.405 141.35,49.692 141.35,41.48 3Q12.G@140.275,40.405
Net3R7_2: 3R7.2 3U1.7 | length 3.8
  Bottom Layer w0.6: 3R7.2@104,54.35 104.852,54.35 106.6,56.098 3U1.7@106.6,56.605
Net3R8_2: 3R8.2 3U2.7 | length 3.8
  Bottom Layer w0.6: 3R8.2@119,54.35 119.852,54.35 121.6,56.098 3U2.7@121.6,56.605
Net3R9_2: 3R9.2 3U3.7 | length 3.8
  Bottom Layer w0.6: 3R9.2@134,54.35 134.852,54.35 136.6,56.098 3U3.7@136.6,56.605
Net3R12_2: 3R12.2 3U1.5 | length 3
  Bottom Layer w0.6: 3U1.5@108.2,56.605 108.2,56.15 3R12.2@110,54.35
Net3R13_2: 3R13.2 3U2.5 | length 3
  Bottom Layer w0.6: 3U2.5@123.2,56.605 123.2,56.15 3R13.2@125,54.35
Net3R14_2: 3R14.2 3U3.5 | length 3
  Bottom Layer w0.6: 3U3.5@138.2,56.605 138.2,56.15 3R14.2@140,54.35
NetC16_2: C16.2 R25.1 U8.5 | length 28.5
  Top Layer w0.254: v2(121.5,164.5) 121.695,164.5 122.72,163.475 122.72,161.748 123.089,161.379 124.021,161.379 ; v2(125.25,160.25) v2@125.15,160.25 ; 124.021,161.379 v2@125.15,160.25 ; 124.021,161.379 v2@125.15,160.25 ; 124.021,161.379 v2@125.15,160.25 ; 124.021,161.379 v2@125.15,160.25 ; 124.021,161.379 v2@125.15,160.25 ; 124.021,161.379 v2@125.15,160.25 ; 124.021,161.379 v2@125.15,160.25 ; 124.021,161.379 v2@125.15,160.25 ; 124.021,161.379 v2@125.15,160.25 ; 124.021,161.379 v2@125.15,160.25 ; 124.021,161.379 v2@125.15,160.25 ; 124.021,161.379 v2@125.15,160.25 ; 124.021,161.379 v2@125.15,160.25 ; 124.021,161.379 v2@125.15,160.25
  Bottom Layer w0.254: 121.5,163.3 v2(121.5,164.5)
NetC17_2: C17.2 R28.2 U8.3 | length 6
  Bottom Layer w0.254: 122.5,163.3 122.5,162.34 122.72,162.12 122.72,161.748 123.089,161.379 126.121,161.379 v2(126.25,161.25) R28.2@126.25,160.625
NetC18_2: C18.2 R29.2 U8.6 | length 4.1
  Bottom Layer w0.254: 121,163.3 121,162.06 121.83,161.229 122.266,161.229 122.429,161.066 122.429,161.021 122.825,160.625 R29.2@123.25,160.625
NetC19_2: C19.2 R30.2 U8.7 | length 27.5
  Bottom Layer w0.254: 120.5,163.3 120.5,162.22 120.572,162.149 120.572,161.578 ; v2(122.25,160.3) 121.85,160.3 ; 120.572,161.578 121.85,160.3 ; 120.572,161.578 121.85,160.3 ; 120.572,161.578 121.85,160.3 ; 120.572,161.578 121.85,160.3 ; 120.572,161.578 121.85,160.3 ; 120.572,161.578 121.85,160.3 ; 120.572,161.578 121.85,160.3 ; 120.572,161.578 121.85,160.3 ; 120.572,161.578 121.85,160.3 ; 120.572,161.578 121.85,160.3 ; 120.572,161.578 121.85,160.3 ; 120.572,161.578 121.85,160.3 ; 120.572,161.578 121.85,160.3 ; 120.572,161.578 121.85,160.3
NetC20_2: C20.2 R31.2 U8.8 | length 2.4
  Bottom Layer w0.254: 120,163.3 120,162.146 120.165,161.98 120.165,161.085 v2(120.25,161)
NetC21_2: C21.2 R32.2 U8.10 | length 2.1
  Bottom Layer w0.254: 119,163.3 119,162.643 118.906,162.549 118.906,161.406 v2@119.013,161.3
  other v2: 118.75,161.3
NetC22_2: C22.2 R33.2 U8.11 | length 2.7
  Bottom Layer w0.254: v2(117.65,161) 117.65,161.4 118.5,162.25 118.5,163.3
NetC23_2: C23.2 R34.2 U8.12 | length 3.4
  Bottom Layer w0.254: v2(116.15,161) 116.658,161.508 117.158,161.508 118,162.35 118,163.3
NetC24_2: C24.2 R35.2 U8.13 | length 4.4
  Bottom Layer w0.254: v2@114.625,161 v2(114.65,161) 114.65,161.025 115.539,161.914 116.989,161.914 117.5,162.425 117.5,163.3
NetC25_2: C25.2 R36.2 U8.14 | length 5.3
  Bottom Layer w0.254: v2(113.15,161) 113.15,161.025 114.446,162.321 116.821,162.321 117,162.499 117,163.3
NetC44_2: C44.2 U9.3
NetD5_K: D5.K L1.2 U9.2
NetJ9_1: J9.1 R18.2
NetJ13_37: J13.37 U8.122
NetJ13_38: J13.38 U8.126
NetLED2_1: LED2.1 R37.1
NetLED2_2: LED2.2 R38.1
NetLED2_3: LED2.3 R39.1
NetR18_1: R18.1 R19.2 R36.1
NetR26_1: R26.1 R27.2 R28.1
NetR35_1: R35.1
NetR48_1: R48.1 U9.1 U9.7 U9.8
NetR49_2: R49.2 R50.2 U9.5
NSTATUS: R46.1 U8.136
PWM_AH1: 1R1.2 1U1.2 U8.47
PWM_AH2: 2R1.2 2U1.2 U8.39
PWM_AH3: 3R1.2 3U1.2 U8.114
PWM_AL1: 1R2.2 1U1.3 U8.45
PWM_AL2: 2R2.2 2U1.3 U8.46
PWM_AL3: 3R2.2 3U1.3 U8.113
PWM_BH1: 1R3.2 1U2.2 U8.43
PWM_BH2: 2R3.2 2U2.2 U8.52
PWM_BH3: 3R3.2 3U2.2 U8.112
PWM_BL1: 1R4.2 1U2.3 U8.38
PWM_BL2: 2R4.2 2U2.3 U8.54
PWM_BL3: 3R4.2 3U2.3 U8.111
PWM_CH1: 1R5.2 1U3.2 U8.41
PWM_CH2: 2R5.2 2U3.2 U8.119
PWM_CH3: 3R5.2 3U3.2 U8.110
PWM_CL1: 1R6.2 1U3.3 U8.44
PWM_CL2: 2R6.2 2U3.3 U8.118
PWM_CL3: 3R6.2 3U3.3 U8.106
RESET_N: R43.1 SW1.2 U8.121
SGPIO30: J13.30 U8.120
SGPIO31: J13.31 U8.127
SGPIO32: J13.32 U8.123
SGPIO33: J13.33 U8.131
SGPIO34: J13.34 U8.124
SGPIO35: J13.35 U8.17
SGPIO36: J13.36 U8.130
STATUSLED_B: R39.2 U8.32
STATUSLED_R: R37.2 U8.33
TCK: J14.1 R47.2 U8.18
TDI: J14.9 R41.1 U8.19
TDO: J14.3 U8.20
TMS: J14.5 R40.1 U8.16
VCC: 1LED1.4 2LED1.4 3LED1.4 C28.2 C29.2 C30.2 C31.2 C32.2 C33.2 C34.2 C35.2 C36.2 C37.2 C38.2 C39.2 C40.2 C41.2 C42.2 C43.2 C54.2 C55.2 C56.2 C57.2 C58.2 C59.2 C60.2 C61.2 C62.2 C63.2 J14.4 J16.1 J16.2 J16.3 J16.4 L2.2 LED2.4 R40.2 R41.2 R42.2 R43.2 R44.2 R45.2 R46.2 R51.2 U8.1 U8.23 U8.31 U8.36 U8.37 U8.40 U8.49 U8.51 U8.67 U8.72 U8.73 U8.82 U8.94 U8.103 U8.108 U8.109 U8.115 U8.117 U8.128 U8.139 U8.144 U10.2 U10.4 U11.3 X1.1 X1.4
pads on no net: 1C1.0 1C2.0 1C3.0 1D1.0 1D2.0 1D3.0 1Q1.7 1Q1.9 1Q1.10 1Q1.11 1Q2.7 1Q2.9 1Q2.10 1Q2.11 1Q3.7 1Q3.9 1Q3.10 1Q3.11 1Q4.7 1Q4.9 1Q4.10 1Q4.11 1Q5.7 1Q5.9 1Q5.10 1Q5.11 1Q6.7 1Q6.9 1Q6.10 1Q6.11 1Q7.7 1Q7.9 1Q7.10 1Q7.11 1Q8.7 1Q8.9 1Q8.10 1Q8.11 1Q9.7 1Q9.9 1Q9.10 1Q9.11 1Q10.7 1Q10.9 1Q10.10 1Q10.11 1Q11.7 1Q11.9 1Q11.10 1Q11.11 1Q12.7 1Q12.9 1Q12.10 1Q12.11 1R1.0 1R2.0 1R3.0 1R4.0 1R5.0 1R6.0 1R7.0 1R8.0 1R9.0 1R10.0 1R11.0 1R12.0 1R13.0 1R14.0 2C1.0 2C2.0 2C3.0 2D1.0 2D2.0 2D3.0 2Q1.7 2Q1.9 2Q1.10 2Q1.11 2Q2.7 2Q2.9 2Q2.10 2Q2.11 2Q3.7 2Q3.9 2Q3.10 2Q3.11 2Q4.7 2Q4.9 2Q4.10 2Q4.11 2Q5.7 2Q5.9 2Q5.10 2Q5.11 2Q6.7 2Q6.9 2Q6.10 2Q6.11 2Q7.7 2Q7.9 2Q7.10 2Q7.11 2Q8.7 2Q8.9 2Q8.10 2Q8.11 2Q9.7 2Q9.9 2Q9.10 2Q9.11 2Q10.7 2Q10.9 2Q10.10 2Q10.11 2Q11.7 2Q11.9 2Q11.10 2Q11.11 2Q12.7 2Q12.9 2Q12.10 2Q12.11 2R1.0 2R2.0 2R3.0 2R4.0 2R5.0 2R6.0 2R7.0 2R8.0 2R9.0 2R10.0 2R11.0 2R12.0 2R13.0 2R14.0 3C1.0 3C2.0 3C3.0 3D1.0 3D2.0 3D3.0 3Q1.7 3Q1.9 3Q1.10 3Q1.11 3Q2.7 3Q2.9 3Q2.10 3Q2.11 3Q3.7 3Q3.9 3Q3.10 3Q3.11 3Q4.7 3Q4.9 3Q4.10 3Q4.11 3Q5.7 3Q5.9 3Q5.10 3Q5.11 3Q6.7 3Q6.9 3Q6.10 3Q6.11 3Q7.7 3Q7.9 3Q7.10 3Q7.11 3Q8.7 3Q8.9 3Q8.10 3Q8.11 3Q9.7 3Q9.9 3Q9.10 3Q9.11 3Q10.7 3Q10.9 3Q10.10 3Q10.11 3Q11.7 3Q11.9 3Q11.10 3Q11.11 3Q12.7 3Q12.9 3Q12.10 3Q12.11 3R1.0 3R2.0 3R3.0 3R4.0 3R5.0 3R6.0 3R7.0 3R8.0 3R9.0 3R10.0 3R11.0 3R12.0 3R13.0 3R14.0 C53.0 C54.0 C55.0 C64.0 D5.0 FID1.0 FID2.0 FID3.0 FID4.0 FID5.0 FID6.0 FID7.0 J14.0 J14.6 J14.7 L2.0 R18.0 R19.0 R25.0 R26.0 R27.0 R40.0 R41.0 R42.0 R43.0 R44.0 R45.0 R46.0 R47.0 R48.0 R49.0 R50.0 R51.0 R52.0 U8.21 U8.22 U8.24 U8.25 U8.50 U8.99 U10.0 U11.0 U11.1

## Polygon pours and split planes (outlines as drawn)
GND on Bottom Layer "FPGAGNDPAD" (solid, shelved, pour order 43): 108.75,180 108.75,167.5 120.75,167.5 120.75,180
1PH_C on Bottom Layer "M0PHCO" (solid, pour order 77): 46,10.5 46,-0.5 60.5,-0.5 60.5,10.5
1PH_B on Bottom Layer "M0PHBO" (solid, pour order 74): 36,12 36,-0.5 46,-0.5 46,12
1PH_A on Bottom Layer "M0PHAO" (solid, pour order 71): 21.5,12 25.5,12 27,13.5 30.5,13.5 30.5,10.5 36,10.5 36,-0.5 21.5,-0.5
DCBUS on Bottom Layer "M0DCBUSC" (solid, pour order 68): 45.5,11 51.5,11 51.5,29.2 45.5,35.2
DCBUS on Bottom Layer "M0DCBUSA" (solid, pour order 67): 15.5,11 21.5,11 21.5,29.2 15.5,35.2
DCBUS on Bottom Layer "M0DCBUSB" (solid, pour order 66): 30.5,11 36.5,11 36.5,29.2 30.5,35.2
1PH_A_Q on Bottom Layer "M0PHA" (solid, pour order 50): 21,54.5 28.373,54.5 28.373,36.468 30,34.74 30,12.5 21,12.5
GND on Bottom Layer "M0GNDA" (solid, pour order 59): 21,29.7 21,54.5 14,54.5 14,36.7
GND on Bottom Layer "M0GNDC" (solid, pour order 58): 51,29.7 51,54.5 44,54.5 44,36.7
1PH_B_Q on Bottom Layer "M0PHB" (solid, pour order 49): 36,54.5 43.373,54.5 43.373,36.479 45,34.751 45,12.5 36,12.5
1PH_C on Bottom Layer "M0PHC" (solid, pour order 48): 51,54.5 59,54.5 59,36.7 60.5,35.2 60.5,4.5 58,2 54,2 51,5
GND on Bottom Layer "M0GNDB" (solid, pour order 57): 36,29.7 36,54.5 29,54.5 29,36.7
2PH_C on Bottom Layer "M0PHCO" (solid, pour order 76): 91,10.5 91,-0.5 105.5,-0.5 105.5,10.5
2PH_B on Bottom Layer "M0PHBO" (solid, pour order 73): 81,12 81,-0.5 91,-0.5 91,12
2PH_A on Bottom Layer "M0PHAO" (solid, pour order 70): 66.5,12 70.5,12 72,13.5 75.5,13.5 75.5,10.5 81,10.5 81,-0.5 66.5,-0.5
DCBUS on Bottom Layer "M0DCBUSC" (solid, pour order 65): 90.5,11 96.5,11 96.5,29.2 90.5,35.2
DCBUS on Bottom Layer "M0DCBUSA" (solid, pour order 64): 60.5,11 66.5,11 66.5,29.2 60.5,35.2
DCBUS on Bottom Layer "M0DCBUSB" (solid, pour order 63): 75.5,11 81.5,11 81.5,29.2 75.5,35.2
2PH_A_Q on Bottom Layer "M0PHA" (solid, pour order 47): 66,54.5 73.373,54.5 73.373,36.479 75,34.751 75,12.5 66,12.5
GND on Bottom Layer "M0GNDA" (solid, pour order 56): 66,29.7 66,54.5 59,54.5 59,36.7
GND on Bottom Layer "M0GNDC" (solid, pour order 55): 96,29.7 96,54.5 89,54.5 89,36.7
2PH_B_Q on Bottom Layer "M0PHB" (solid, pour order 46): 81,54.5 88.373,54.5 88.373,36.496 90,34.767 90,12.5 81,12.5
GND on Bottom Layer "M0GNDB" (solid, pour order 54): 81,29.7 81,54.5 74,54.5 74,36.7
2PH_C on Bottom Layer "M0PHC" (solid, pour order 45): 96,54.5 104,54.5 104,36.7 105.5,35.2 105.5,4.5 103,2 99,2 96,5
3PH_C on Bottom Layer "M0PHC" (solid, pour order 44): 140.5,54.5 148.5,54.5 148.5,35 150,33.5 150,4.5 147.5,2 143.5,2 140.5,5
3PH_C on Bottom Layer "M0PHCO" (solid, pour order 75): 135.5,10.5 135.5,-0.5 150,-0.5 150,10.5
3PH_B on Bottom Layer "M0PHBO" (solid, pour order 72): 125.5,12 125.5,-0.5 135.5,-0.5 135.5,12
3PH_A on Bottom Layer "M0PHAO" (solid, pour order 69): 111,12 115,12 116.5,13.5 120,13.5 120,10.5 125.5,10.5 125.5,-0.5 111,-0.5
DCBUS on Bottom Layer "M0DCBUSC" (solid, pour order 62): 135,10.5 141,10.5 141,29.7 135,35.7
DCBUS on Bottom Layer "M0DCBUSA" (solid, pour order 61): 105,10.5 111,10.5 111,29.5 105,35.5
DCBUS on Bottom Layer "M0DCBUSB" (solid, pour order 60): 120,10.5 126,10.5 126,29.7 120,35.7
3PH_A_Q on Bottom Layer "M0PHA" (solid, pour order 43): 110.5,54.5 117.873,54.5 117.873,37.561 119.5,35.833 119.5,12.5 110.5,12.5
GND on Bottom Layer "M0GNDA" (solid, pour order 53): 110.5,30.7 110.5,54.5 103.5,54.5 103.5,37.7
GND on Bottom Layer "M0GNDC" (solid, pour order 52): 140.5,30.7 140.5,54.5 133.5,54.5 133.5,37.7
3PH_B_Q on Bottom Layer "M0PHB" (solid, pour order 42): 125.5,54.5 132.873,54.5 132.873,37.497 134.5,35.769 134.5,12.5 125.5,12.5
GND on Bottom Layer "M0GNDB" (solid, pour order 51): 125.5,30.7 125.5,54.5 118.5,54.5 118.5,37.7
VCC on Bottom Layer "VCC" (solid, shelved, pour order 78): 0,150 0,54.5 150,54.5 150,150
GND on Top Layer "FPGAGNDPAD" (solid, shelved, pour order 41): 108.75,180 108.75,167.5 120.75,167.5 120.75,180
DCBUS on Top Layer "DCBUS" (solid, shelved, pour order 41): 0,31.5 0,11 150,11 150,31.5
GND on Top Layer "BUSGND" (solid, shelved, pour order 40): 0,31.5 0,150 150,150 150,31.5

## Silkscreen, mask and mechanical layers (free items; w line width, h text height)
Top Overlay:
  lines w0.2: 84.5,141 87,138.5 99,138.5 99,141 84.5,141
  text "Slow" at 89.5,139 h1.52 r357.27

## Text inside footprints (layer, text, board x,y; h text height)
J13: Top Overlay "1" at 97.46,80.492 h1.27; Top Overlay "2" at 97.46,83.032 h1.27; Top Overlay "40" at 150.292,83.032 h1.27; Top Overlay "39" at 150.292,80.492 h1.27
J14: Top Overlay "2" at 25.682,74.174 h0.76 r270; Top Overlay "1" at 33.937,73.829 h0.76 r90; Top Overlay "10" at 25.682,84.595 h0.76 r270; Top Overlay "9" at 33.937,83.547 h0.76 r90